# EAGLE board LUPAss (EAGLE 8.2.2)
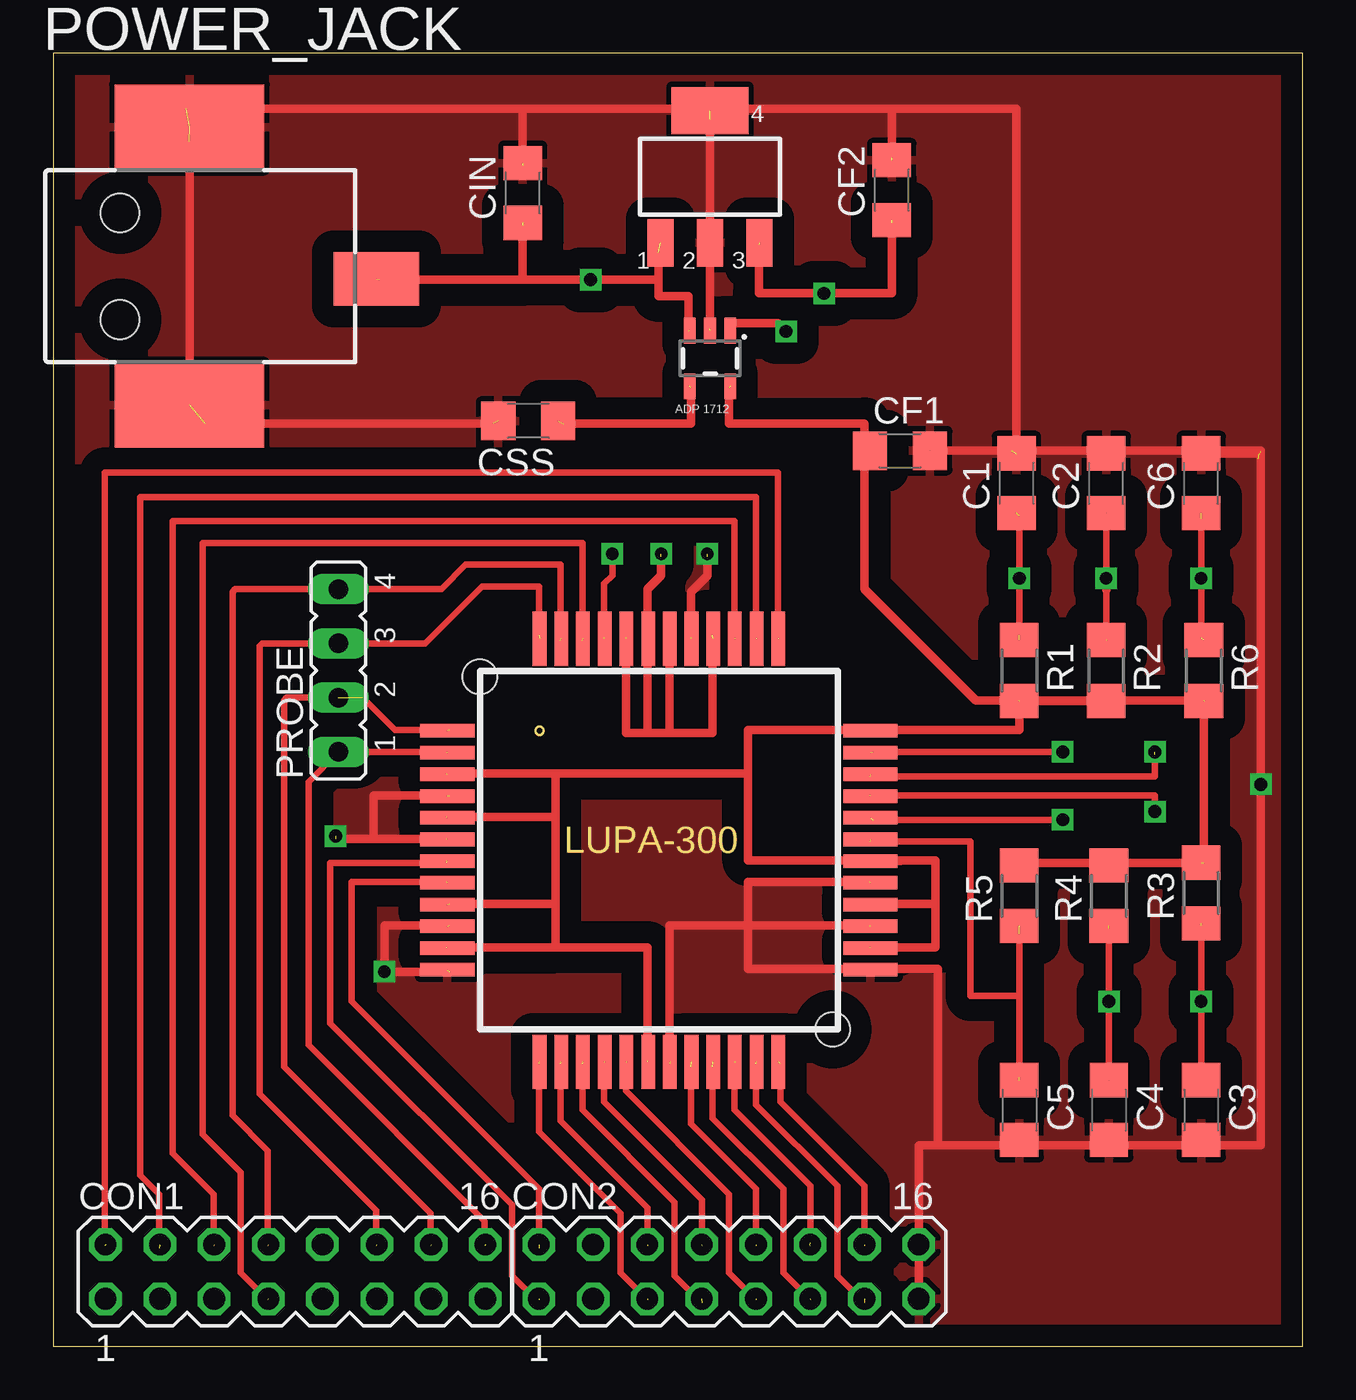
[diagram p0: board, top side]
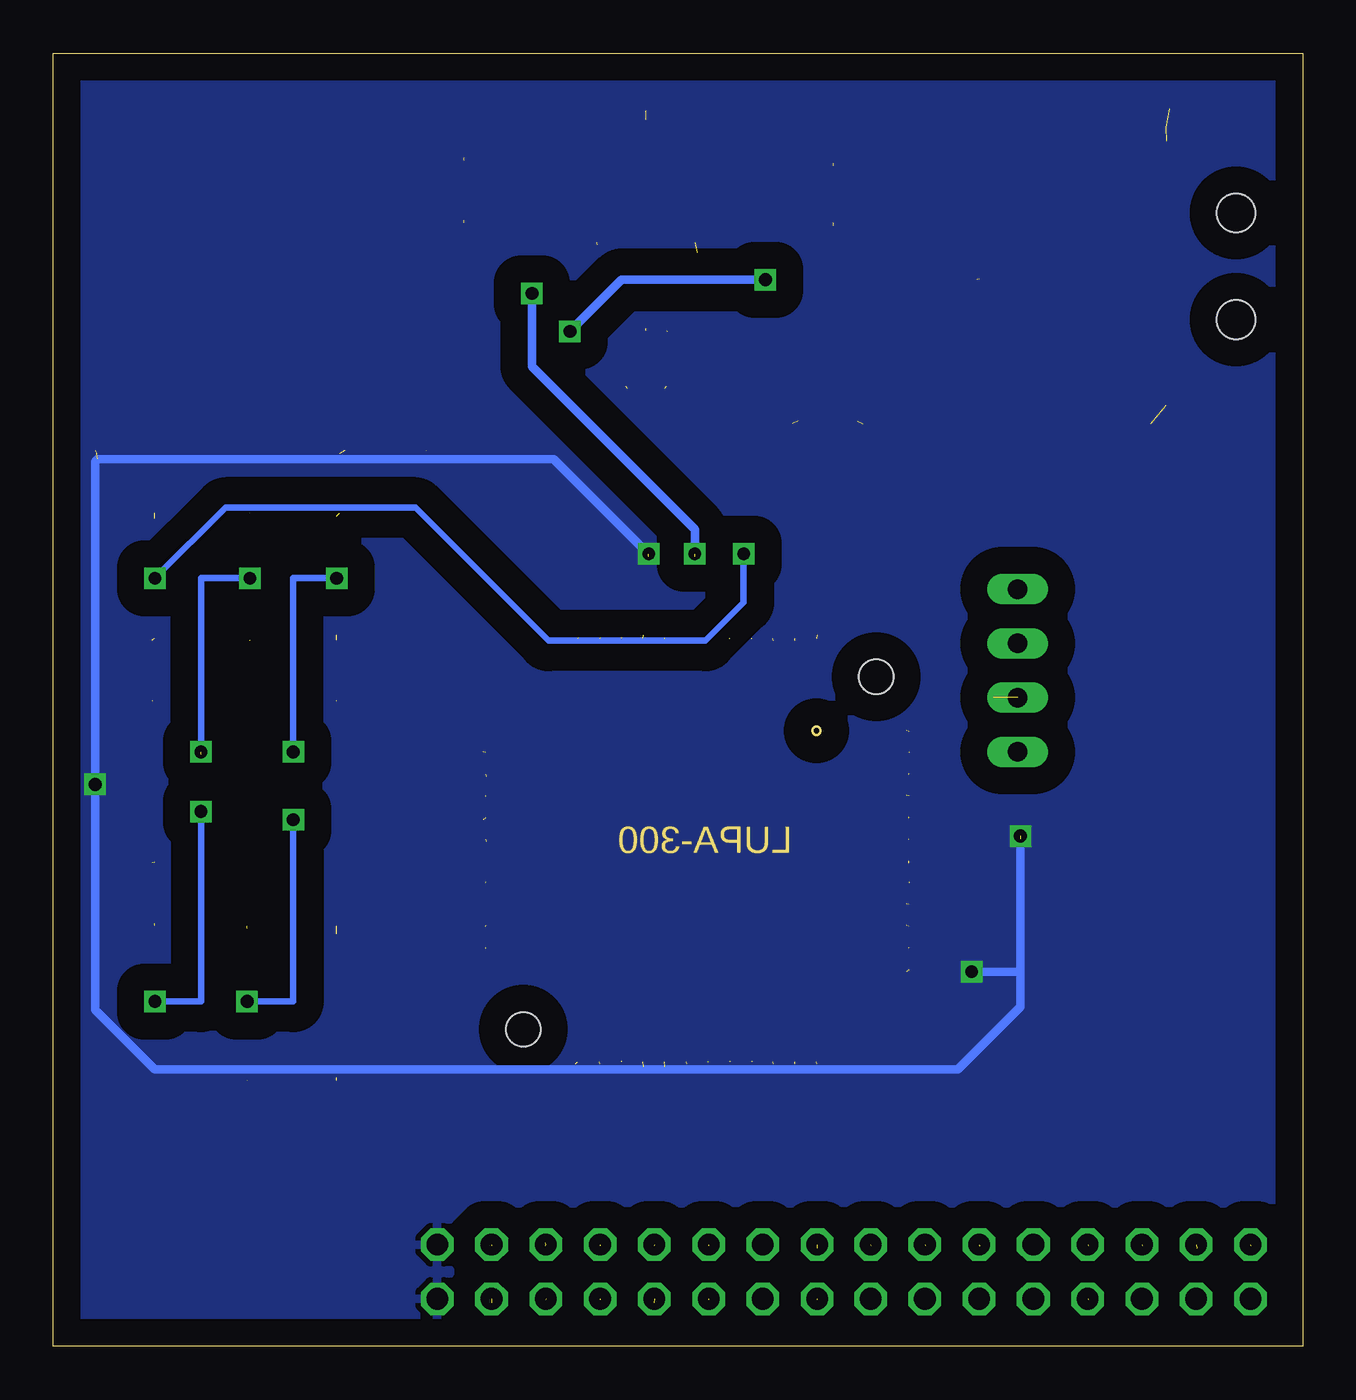
[diagram p1: board, bottom side, seen from below]

Size 58.47 x 60.51 mm. Coordinates in mm from the lower left corner, seen from the top.
Outline: 0,0 58.47,0 58.47,60.51 0,60.51 0,0
Copper layers (1*16): Top 0.035mm / dielectric 1.5mm / Bottom 0.035mm
Design rules "default": minimum track width 6mil, minimum drill 0.35mm, track to track 6mil, track to pad 6mil, pad to pad 6mil, via to via 6mil, smd to smd 6mil, copper to edge 40mil, drill to drill 6mil, minimum pad ring 10mil, minimum via ring 8mil, stop-mask expansion 4mil, vias tented up to drill 0mil, thermal gap 10mil

## Footprints (pad centres in the part's own frame; a part is rotated, then mirrored left to right if it is on the bottom)
C3216 = smd 1.6 x 1.8: 1 -1.4,0; 2 1.4,0
MA08-2 = drill 1.016 octagon: 1 -8.89,-1.27; 2 -8.89,1.27; 3 -6.35,-1.27; 4 -6.35,1.27; 5 -3.81,-1.27; 6 -3.81,1.27; 7 -1.27,-1.27; 8 -1.27,1.27; 9 1.27,-1.27; 10 1.27,1.27; 11 3.81,-1.27; 12 3.81,1.27; 13 6.35,-1.27; 14 6.35,1.27; 15 8.89,-1.27; 16 8.89,1.27
694106105102 = smd 4 x 2.5: 1 15.5,-0.6 | smd 7 x 4: 2 6.75,6.5; 3 6.75,-6.5 | hole 1.8: 3.5,2.5; 3.5,-2.5
JP4 = drill 0.914 long: 1 -3.81,0; 2 -1.27,0; 3 1.27,0; 4 3.81,0
R1206 = smd 1.6 x 1.803: 1 -1.422,0; 2 1.422,0
LUPA300 = smd 2.54 x 0.635: P$1 -2.794,1.524; P$2 -2.794,2.54; P$3 -2.794,3.556; P$4 -2.794,4.572; P$5 -2.794,5.588; P$6 -2.794,6.604; P$7 -2.794,7.62; P$8 -2.794,8.636; P$9 -2.794,9.652; P$10 -2.794,10.668; P$11 -2.794,11.684; P$12 -2.794,12.7; P$13 17.018,12.7; P$14 17.018,11.684; P$15 17.018,10.668; P$16 17.018,9.652; P$17 17.018,8.636; P$18 17.018,7.62; P$19 17.018,6.604; P$20 17.018,5.588; P$21 17.018,4.572; P$22 17.018,3.556; P$23 17.018,2.54; P$24 17.018,1.524 | smd 0.635 x 2.54: P$25 1.524,-2.794; P$26 2.54,-2.794; P$27 3.556,-2.794; P$28 4.572,-2.794; P$29 5.588,-2.794; P$30 6.604,-2.794; P$31 7.62,-2.794; P$32 8.636,-2.794; P$33 9.652,-2.794; P$34 10.668,-2.794; P$35 11.684,-2.794; P$36 12.7,-2.794; P$37 1.524,17.018; P$38 2.54,17.018; P$39 3.556,17.018; P$40 4.572,17.018; P$41 5.588,17.018; P$42 6.604,17.018; P$43 7.62,17.018; P$44 8.636,17.018; P$45 9.652,17.018; P$46 10.668,17.018; P$47 11.684,17.018; P$48 12.7,17.018 | hole 1.6: -1.27,15.24; 15.24,-1.27
SOT23-5 = smd 0.55 x 1.2: 1 -0.95,-1.3; 2 0,-1.3; 3 0.95,-1.3; 4 0.95,1.3; 5 -0.95,1.3
SOT223 = smd 1.219 x 2.235: 1 -2.311,-3.099; 2 0,-3.099; 3 2.311,-3.099 | smd 3.6 x 2.2: 4 0,3.099

## Placement (x,y rotation side)
C1  100nF  [C3216]  45.09,40.39 90 top
C2  100nF  [C3216]  49.28,40.39 90 top
C3  100nF  [C3216]  53.72,11.05 270 top
C4  100nF  [C3216]  49.4,11.05 270 top
C5  100nF  [C3216]  45.21,11.05 270 top
C6  100nF  [C3216]  53.72,40.39 90 top
CF1  2.2uF  [C3216]  39.62,41.91 0 top
CF2  22uF  [C3216]  39.24,54.1 90 top
CIN  2.2uF  [C3216]  21.97,53.98 90 top
CON1  1  [MA08-2]  11.33,3.48 0 top
CON2  2  [MA08-2]  31.61,3.48 0 top
CSS  2pF  [C3216]  22.23,43.31 180 top
POWER_JACK  694106105102  [694106105102]  -0.38,50.55 0 top
PROBE  OSC  [JP4]  13.34,31.62 90 top
R1  500k  [R1206]  45.21,31.62 270 top
R2  1.5M  [R1206]  49.28,31.62 270 top
R3  42k  [R1206]  53.72,21.21 90 top
R4  110k  [R1206]  49.4,21.08 90 top
R5  10k  [R1206]  45.21,21.08 90 top
R6  68k  [R1206]  53.85,31.62 270 top
U$1  IS  [LUPA300]  21.23,16.1 0 top
U$2  ADP1712  [SOT23-5]  30.73,46.23 180 top
U$3  MIC5209-3.3  [SOT223]  30.73,54.74 0 top

## Library data of the parts
C1-C6 CF1 CF2 CIN CSS R1-R6 = resistor
CON1 CON2 = con-lstb; OC_FARNELL: unknown; OC_NEWARK: unknown
POWER_JACK = Wurth_Elektronik_Electromechanic_DC_Power_Jack_Connectors_rev15c
PROBE = jumper
U$1 = LUPA300
U$2 = ADP1712
U$3 = MIC5209-3.3

## Nets
2.5V: CF1.1 R1.2 R2.2 R3.2 R4.2 R5.2 R6.2 U$1.P$2 U$1.P$4 U$1.P$8 U$1.P$10 U$1.P$13 U$1.P$19 U$1.P$21 U$1.P$23 U$1.P$30 U$2.5
3.3V: CF2.1 U$1.P$41 U$1.P$42 U$1.P$43 U$1.P$45 U$3.3
CLK: CON2.2 U$1.P$5
D0: CON2.5 U$1.P$25
D1: CON2.6 U$1.P$26
D2: CON2.7 U$1.P$27
D3: CON2.8 U$1.P$28
D4: CON2.9 U$1.P$29
D5: CON2.10 U$1.P$32
D6: CON2.11 U$1.P$33
D7: CON2.12 U$1.P$34
D8: CON2.13 U$1.P$35
D9: CON2.14 U$1.P$36
FRAME_VALID: CON1.8 PROBE.4 U$1.P$38
GND: C1.2 C2.2 C3.2 C4.2 C5.2 C6.2 CF1.2 CF2.2 CIN.2 CON2.15 CON2.16 CSS.2 POWER_JACK.2 POWER_JACK.3 U$1.P$1 U$1.P$3 U$1.P$7 U$1.P$9 U$1.P$20 U$1.P$22 U$1.P$24 U$1.P$31 U$1.P$44 U$2.2 U$3.2 U$3.4
IN: CIN.1 POWER_JACK.1 U$2.1 U$2.3 U$3.1
INT_TIME1: CON1.16 PROBE.1 U$1.P$11
INT_TIME2: CON1.14 PROBE.2 U$1.P$12
INT_TIME3: CON1.12 PROBE.3 U$1.P$37
LINE_VALID: CON1.7 U$1.P$39
N$2: C1.1 R1.1 U$1.P$14
N$3: C2.1 R2.1 U$1.P$15
N$4: C4.1 R4.1 U$1.P$17
N$7: C3.1 R3.1 U$1.P$16
N$8: C5.1 R5.1 U$1.P$18
N$10: C6.1 R6.1 U$1.P$40
RESET_N: CON2.1 U$1.P$6
SPI_CLK: CON1.4 U$1.P$47
SPI_DATA: CON1.6 U$1.P$46
SPI_EN: CON1.2 U$1.P$48
SS: CSS.1 U$2.4

## Tracks (layer width: path | path; a pad name or v marks a point on that pad's centre or on a via)
2.5V  (10 unrouted)
  Top 0.152: CF1.1 38.14,41.91 37.97,42.08
  Top 0.305: R4.2 48.55,22.5 48.45,22.61
  Top 0.406: 37.29,28.83 32.51,28.83 32.51,26.8 | 37.29,28.83 45.21,28.83 45.21,30.23 | 45.21,30.23 53.85,30.23 53.85,22.61 48.45,22.61 45.31,22.61 | 45.31,22.61 45.21,22.61 | R1.2 R2.2 | 45.31,22.61 R5.2 | 38.23,18.67 41.27,18.67 41.27,20.7 | 41.27,20.7 41.27,22.73 39.69,22.73 | 39.69,22.73 32.51,22.73 32.51,26.8 | 41.27,20.7 38.23,20.7 U$1.P$21 | 18.41,26.8 23.5,26.8 | 23.5,26.8 32.51,26.8 | 18.41,18.67 23.5,18.67 | 23.5,18.67 23.5,20.7 | 23.5,20.7 23.5,24.77 | 23.5,24.77 23.5,26.8 | 18.41,24.77 23.5,24.77 | 18.54,20.7 23.5,20.7 | 27.81,13.34 27.81,18.67 23.5,18.67 | U$1.P$19 39.66,22.7 39.69,22.73 | U$1.P$13 37.32,28.8 37.29,28.83 | 31.62,44.83 31.62,43.18 37.97,43.18 37.97,42.08 37.97,35.43 43.18,30.23 45.21,30.23
3.3V  (via drill 0.6)  (5 unrouted)
  Top 0.406: 26.8,33.15 26.8,28.7 27.81,28.7 | 27.81,28.7 28.83,28.7 | 28.83,28.7 30.86,28.7 30.86,33.27 | 27.81,33.01 27.81,35.43 28.45,36.07 28.45,36.96 | 27.81,33.01 27.81,28.7 | 28.83,32.3 28.83,33.15 | 28.83,32.3 28.83,28.7 | U$1.P$43 28.85,32.19 28.83,32.3 | U$1.P$42 27.83,33.03 27.81,33.01 | 33.02,51.56 33.02,49.28 v36.07,49.28 39.24,49.28 39.24,52.58
  Bottom 0.406: v36.07,49.28 36.07,45.85 28.45,38.23 v28.45,37.08
CLK  (2 unrouted)
  Top 0.305: 18.41,21.72 13.97,21.72 13.97,16.13 22.73,7.37 22.73,4.57
D0  (2 unrouted)
  Top 0.305: 22.73,13.21 22.73,10.03 26.54,6.22 26.54,3.43 27.81,2.16
D1  (2 unrouted)
  Top 0.305: 27.56,4.95 27.81,4.7 27.81,6.48 23.75,10.54 23.75,13.21
D2  (2 unrouted)
  Top 0.305: 24.77,13.21 24.77,11.05 29.08,6.73 29.08,3.3 30.35,2.03
D3  (2 unrouted)
  Top 0.305: 25.78,13.34 25.78,11.43 30.35,6.86 30.35,4.7
D4  (2 unrouted)
  Top 0.305: 26.8,13.34 26.8,11.94 31.62,7.11 31.62,3.43 32.89,2.16
D5  (2 unrouted)
  Top 0.305: 29.84,13.08 29.84,10.41 32.89,7.37 32.89,4.7
D6  (2 unrouted)
  Top 0.305: 30.86,13.08 30.86,10.67 34.16,7.37 34.16,3.43 35.43,2.16
D7  (3 unrouted)
  Top 0.305: 35.69,4.95 35.43,4.7 | 31.88,13.34 31.88,11.05 35.43,7.49 35.43,4.83
D8  (2 unrouted)
  Top 0.305: 32.89,13.21 32.89,11.3 36.7,7.49 36.7,3.3 37.97,2.03
D9  (2 unrouted)
  Top 0.305: 34.04,13.21 34.04,11.43 37.97,7.49 37.97,4.7
FRAME_VALID  (2 unrouted)
  Top 0.305: 23.75,33.02 23.75,36.58 19.3,36.58 18.16,35.43 PROBE.4 8.51,35.43 8.38,35.31 8.38,10.79 10.03,9.14 10.03,4.7
GND  (via drill 0.6)  (23 unrouted)
  Top 0.152: C1.2 45.13,41.79 | C2.2 49.28,41.83 49.35,41.91
  Top 0.406: 38.23,21.72 32.51,21.72 32.51,19.68 | 32.51,19.68 32.51,17.65 37.1,17.65 | 37.1,17.65 41.4,17.65 41.4,9.4 | 38.23,19.68 32.51,19.68 | 28.83,13.21 28.83,19.68 32.51,19.68 | 54.16,9.4 49.34,9.4 | 54.16,9.4 56.52,9.4 56.52,41.91 49.35,41.91 45.25,41.91 45.13,41.79 | C4.2 49.4,9.46 49.34,9.4 | 41.4,9.4 40.51,9.4 40.51,4.67 | 40.51,2.16 40.51,2.22 | 40.51,2.22 CON2.15 | 40.51,4.67 40.51,2.22 | CON2.16 40.5,4.68 40.51,4.67 | U$1.P$24 37.13,17.62 37.1,17.65 | C6.2 56.44,41.79 | 45.32,9.4 41.4,9.4 | 45.32,9.4 49.34,9.4 | C5.2 45.21,9.51 45.32,9.4 | C3.2 53.91,9.65 54.16,9.4 | 18.54,17.53 v15.49,17.53 15.49,19.68 18.54,19.68 | 18.54,25.78 14.99,25.78 14.99,23.75 | 14.99,23.75 18.41,23.75 | 29.84,33.15 29.84,35.31 30.61,36.07 30.61,36.96 | v13.21,23.88 13.34,23.75 14.99,23.75 | 20.57,43.18 7.11,43.18 | POWER_JACK.3 6.37,56.37 6.35,56.39 | 31.25,57.91 39.24,57.91 | 31.25,57.91 21.97,57.91 | 21.97,57.91 6.22,57.91 | 21.97,55.24 21.97,57.91 | 39.24,55.63 39.24,57.91 | U$3.4 31.18,57.84 31.25,57.91 | 30.73,47.62 U$3.2 30.73,57.4 | 39.24,57.91 43.18,57.91 43.81,57.91 45.09,57.91 C1.2 | CF1.2 44.83,41.91
  Bottom 0.406: v15.49,17.53 13.21,17.53 | 13.21,17.53 13.21,23.75 | v30.61,37.08 35.05,41.53 56.39,41.53 56.52,41.4 v56.52,26.29 56.52,15.75 53.72,12.95 16.13,12.95 13.21,15.88 13.21,17.53
  pour Bottom (isolate 1.27): 0.13,-0.13 58.55,0 58.55,60.71 0.13,60.58
  pour Top (isolate 1.016): 0,0 58.55,0 58.55,60.45 0,60.45
IN  (via drill 0.6)  (4 unrouted)
  Top 0.406: 15.24,49.91 21.97,49.91 | 25.27,49.91 21.97,49.91 | 25.27,49.91 28.32,49.91 | 28.32,49.91 28.32,51.18 | 29.72,47.5 29.72,49.15 28.32,49.15 28.32,49.91 | 21.97,52.45 21.97,49.91 | U$2.1 31.68,47.81 31.75,47.88 33.91,47.88 v34.29,47.5 | v25.15,49.91 25.27,49.91
  Bottom 0.406: v34.29,47.5 31.88,49.91 v25.15,49.91
INT_TIME1  (2 unrouted)
  Top 0.305: 18.41,27.81 PROBE.1 11.94,26.42 11.94,14.1 20.19,5.84 20.19,4.7
INT_TIME2  (3 unrouted)
  Top 0.305: 18.54,28.83 16,28.83 14.48,30.35 10.92,30.35 10.79,30.23 10.79,13.08 17.65,6.22 17.65,4.7
INT_TIME3  (2 unrouted)
  Top 0.305: 22.73,33.27 22.73,35.56 20.07,35.56 17.4,32.89 PROBE.3 9.78,32.89 9.65,32.77 9.65,11.81 15.11,6.35 15.11,4.7
LINE_VALID  (2 unrouted)
  Top 0.305: 24.77,33.02 24.77,37.59 6.99,37.59 6.99,9.91 8.76,8.13 8.76,3.43 10.03,2.16
N$2  (via drill 0.6)  (3 unrouted)
  Top 0.305: 45.21,33.27 45.21,35.56 45.21,38.86 | 38.35,27.81 v47.24,27.81
  Top 0.406: v45.21,35.94 45.21,35.56
  Bottom 0.305: v47.24,27.81 47.24,35.94 v45.21,35.94
N$3  (via drill 0.6)  (4 unrouted)
  Top 0.305: 49.28,35.39 49.28,33.02 | v49.28,35.94 C2.1 | 38.23,26.67 51.56,26.67 51.56,27.69
  Top 0.406: v49.28,35.94 49.28,35.39
  Bottom 0.305: v51.56,27.81 51.56,35.94 v49.28,35.94
N$4  (via drill 0.6)  (3 unrouted)
  Top 0.305: C4.1 v49.4,16.13 49.4,19.56 | 38.35,24.64 v47.24,24.64
  Bottom 0.305: v47.24,24.64 47.24,16.13 v49.4,16.13
N$7  (via drill 0.6)  (2 unrouted)
  Top 0.305: C3.1 v53.72,16.13 53.72,19.68 | 38.23,25.78 51.56,25.78 v51.56,25.02
  Bottom 0.305: v51.56,25.02 51.56,16.13 v53.72,16.13
N$8  (3 unrouted)
  Top 0.305: 45.21,12.57 45.21,16.38 | 45.21,16.38 45.21,19.3 | 38.23,23.62 42.93,23.62 42.93,16.38 45.21,16.38
N$10  (via drill 0.6)  (3 unrouted)
  Top 0.305: 53.72,33.15 53.72,35.52 53.72,38.73 | 25.78,33.15 25.78,35.69 26.16,36.07 v26.16,37.08
  Top 0.406: v53.72,35.94 53.72,35.52
  Bottom 0.305: v26.16,37.08 26.16,34.8 27.94,33.02 35.31,33.02 41.53,39.24 50.42,39.24 v53.72,35.94
RESET_N  (2 unrouted)
  Top 0.305: 18.41,22.61 12.95,22.61 12.95,15.11 21.46,6.6 21.46,3.3 22.61,2.16 22.73,2.16
SPI_CLK  (2 unrouted)
  Top 0.305: 32.89,33.15 32.89,39.75 4.06,39.75 4.06,8 4.95,7.11 4.95,4.57
SPI_DATA  (2 unrouted)
  Top 0.305: 31.88,33.15 31.88,38.61 5.59,38.61 5.59,9.02 7.49,7.11 7.49,4.7
SPI_EN  (2 unrouted)
  Top 0.305: 33.91,33.15 33.91,40.89 2.41,40.89 2.41,4.7
SS  (2 unrouted)
  Top 0.406: 29.84,44.83 29.84,43.18 23.88,43.18